# Altium PCB STEVAL-ESLWB0CB.PcbDoc (part 1 of 3)
Units mm, origin at the board's own origin, x right, y up, seen from the top; angles counter-clockwise.
Board outline 45.59 x 31.82 mm, 4 copper layers (Top Layer, Mid Layer 1, Mid Layer 2, Bottom Layer), stack 0.886 mm thick; 85 components, 64 nets, 270 pads, 388 vias.
Unrouted connection lines stored in the file: 146.
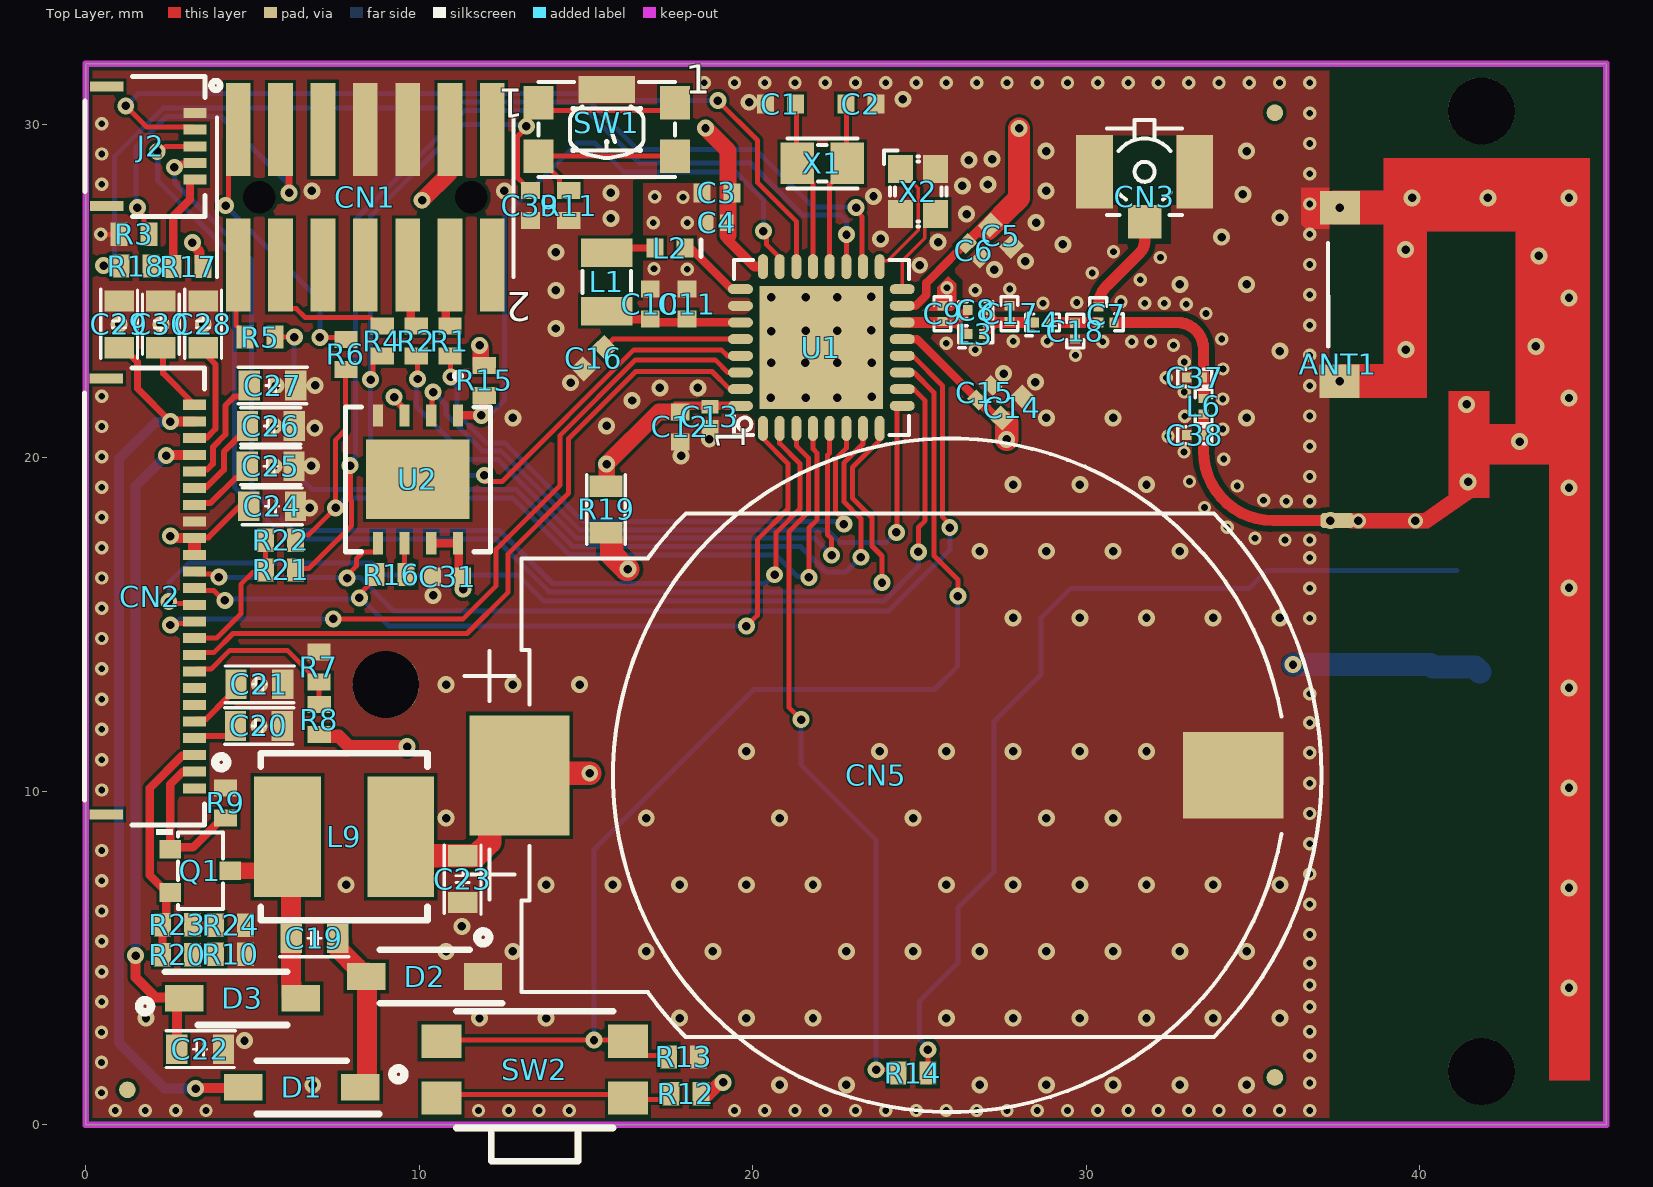
[diagram p0: Top Layer view]
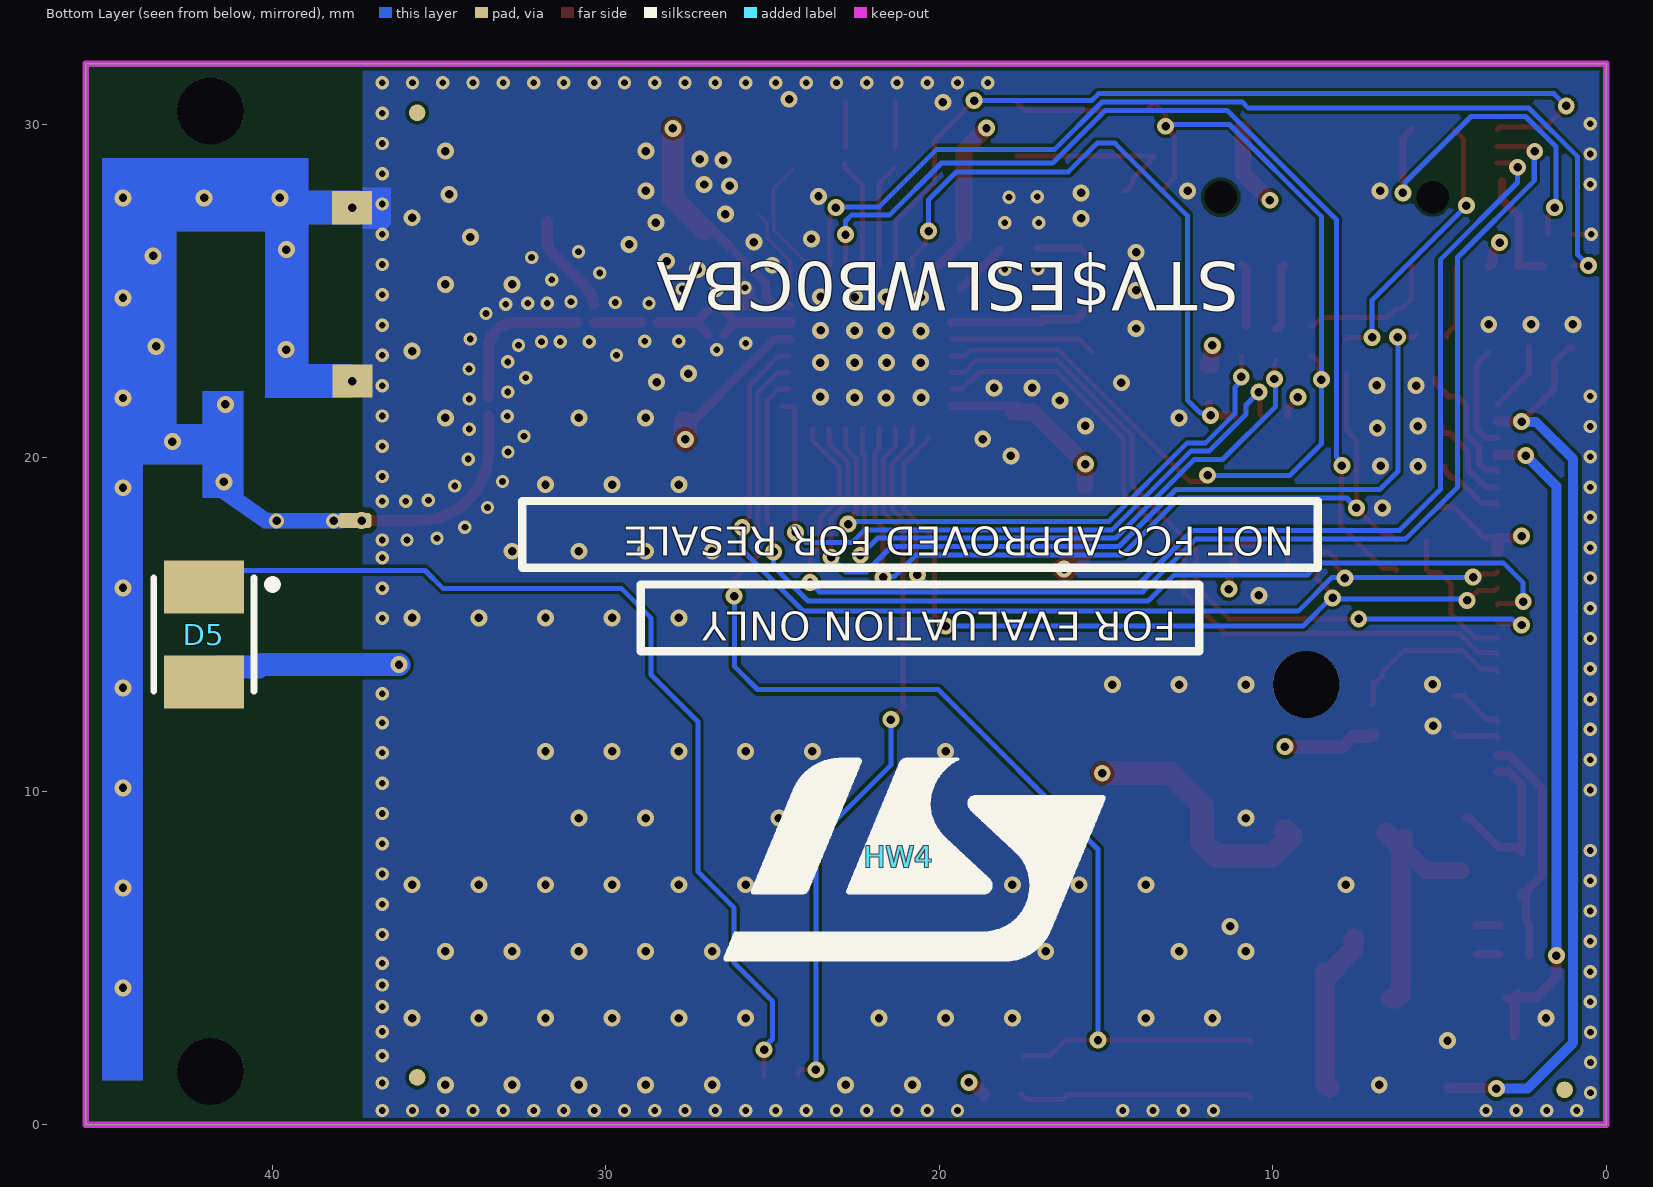
[diagram p1: Bottom Layer view, seen from below]
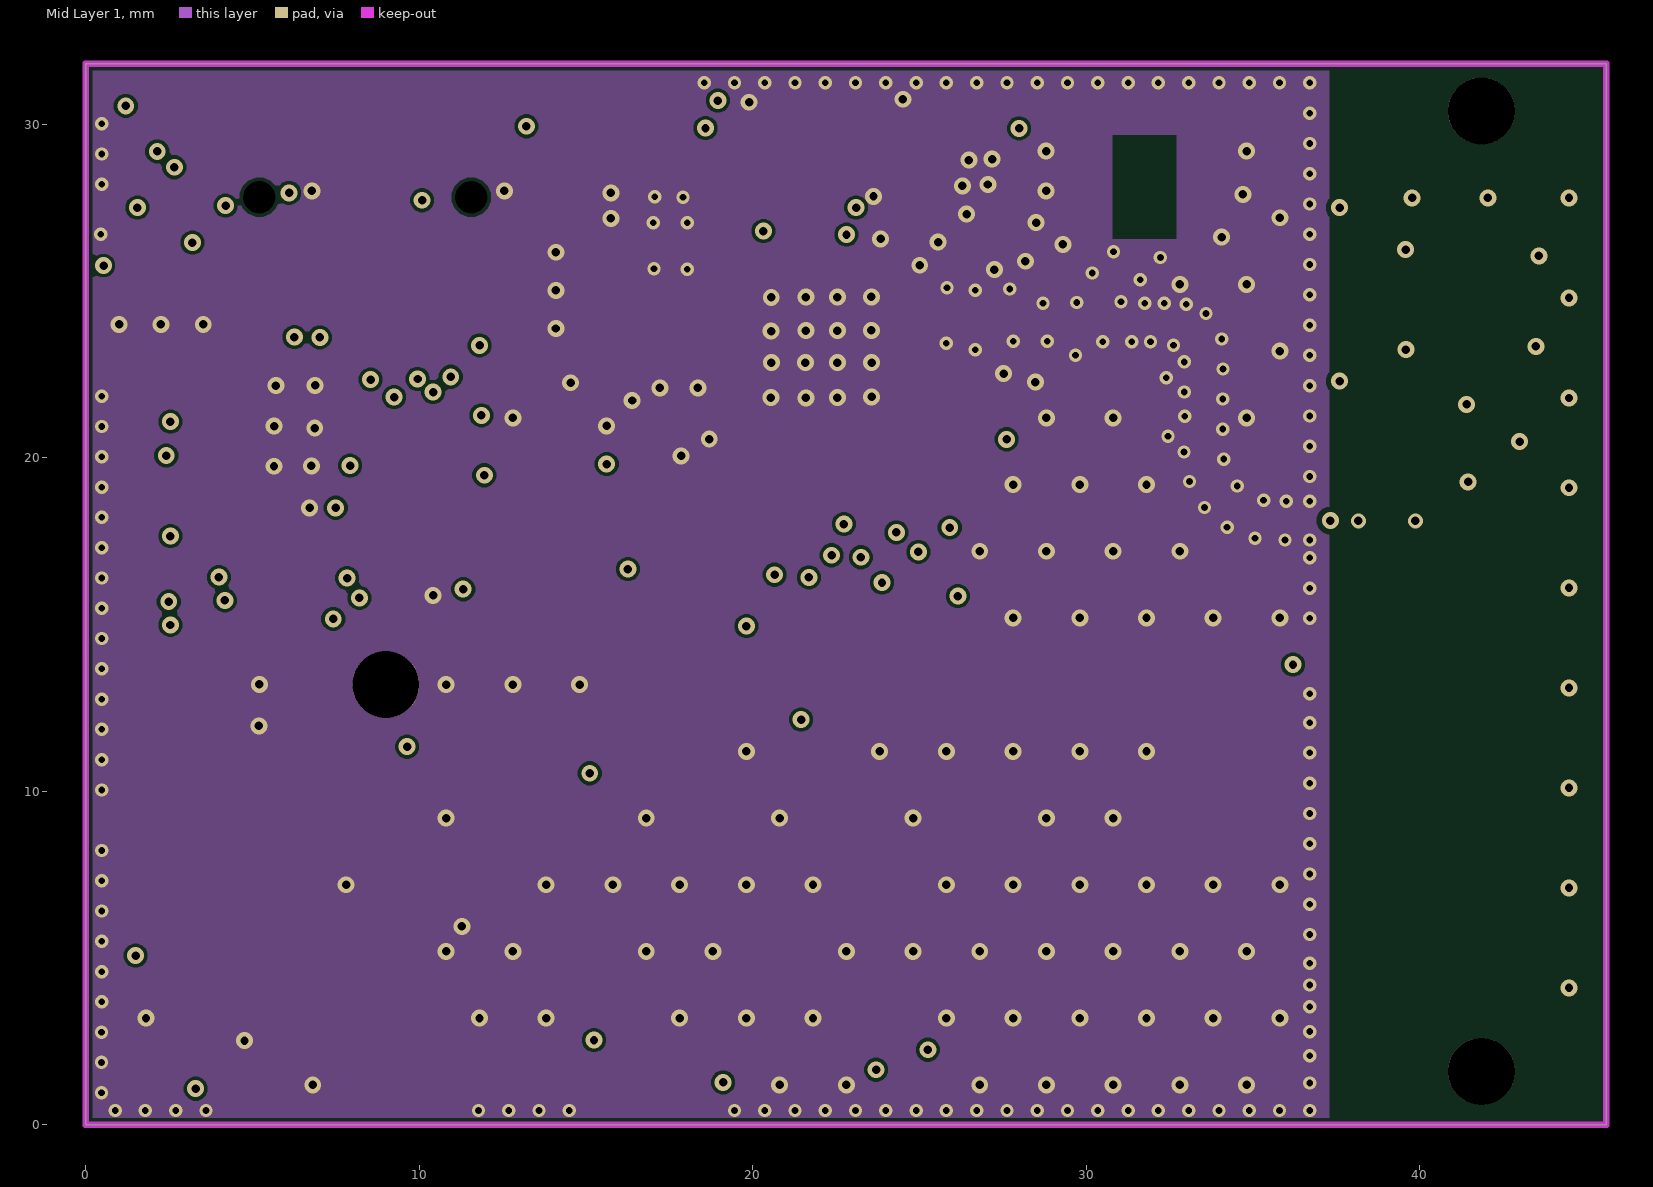
[diagram p2: Mid Layer 1]
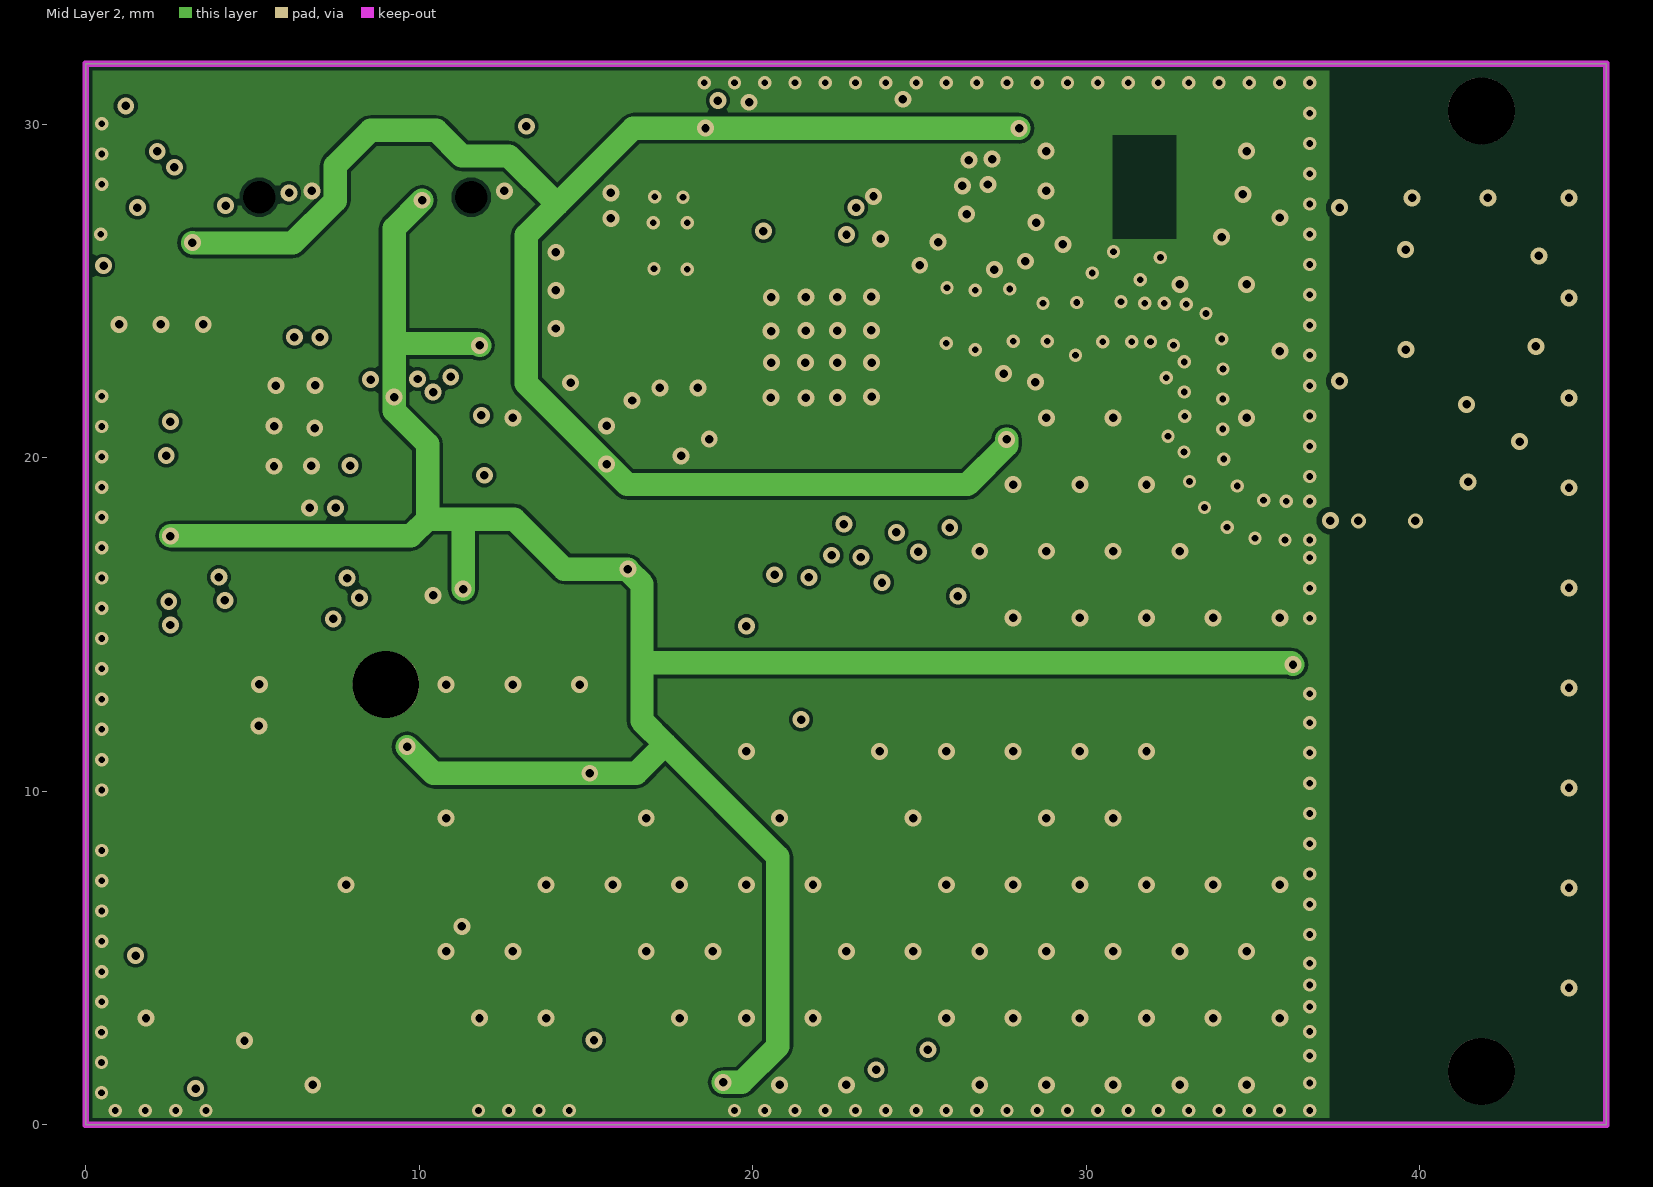
[diagram p3: Mid Layer 2]
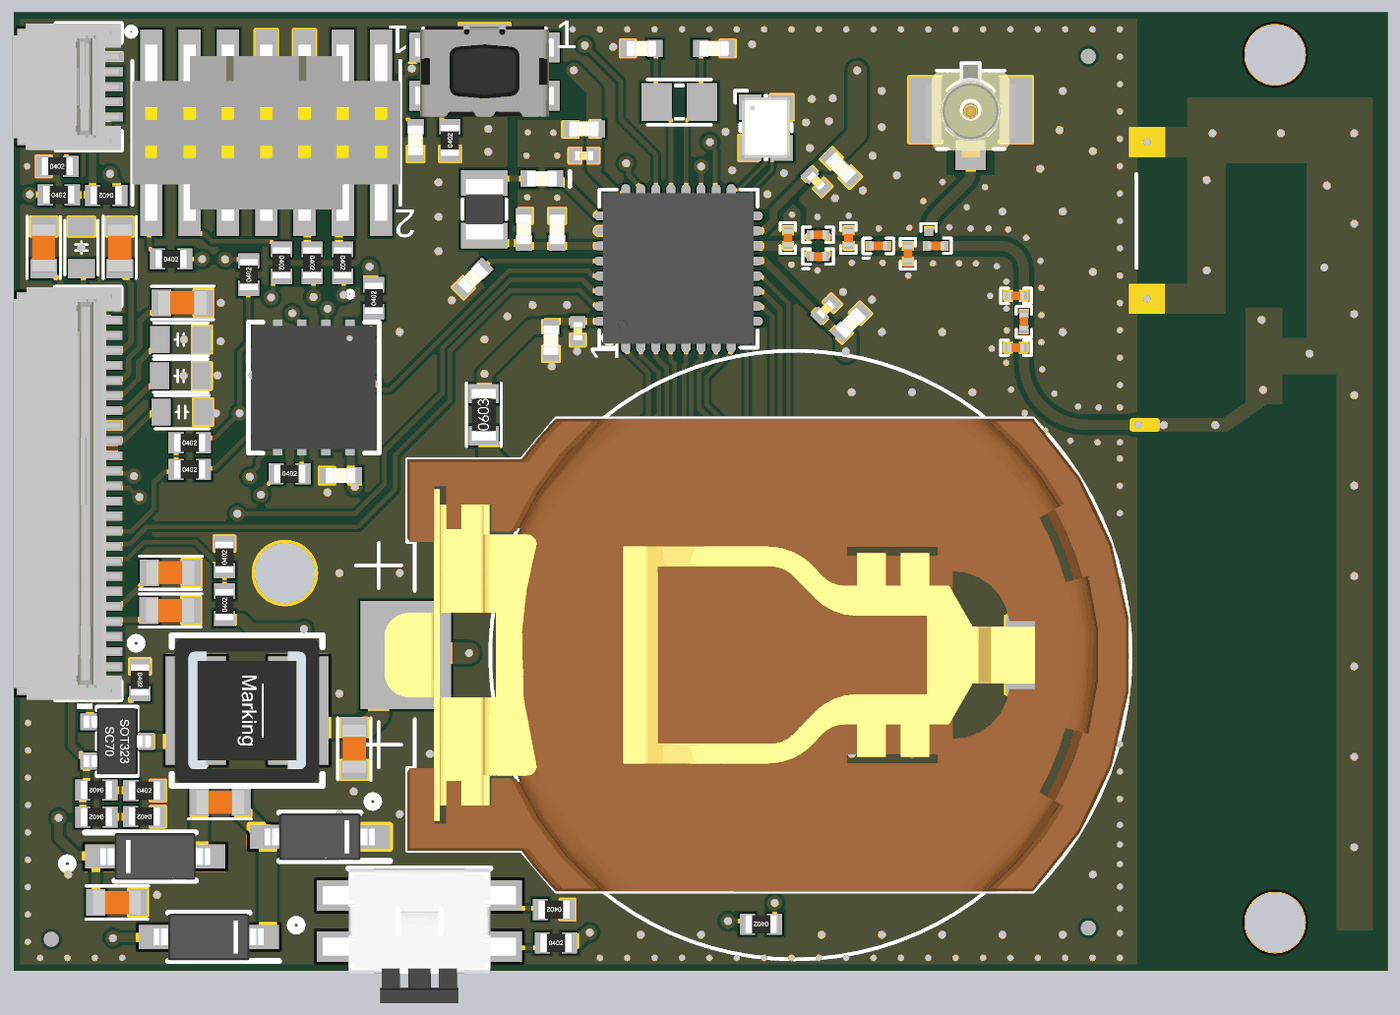
[diagram p5: 3D render of the assembled board from above, using the file's embedded part models]

## Layer stack, top to bottom
Top Solder: solder mask 0.0102, Solder Resist, Dk 3.5
Top Layer: signal copper 0.035
Dielectric 1: core 0.24, S-1000-2 (2x2116), Dk 4.34
Mid Layer 1: signal copper 0.018
Dielectric 2: core 0.3, S-1000-2 (2x1506), Dk 4.6
Mid Layer 2: signal copper 0.018
Dielectric 3: core 0.24, S-1000-2 (2x2116), Dk 4.34
Bottom Layer: signal copper 0.035
Bottom Solder: solder mask 0.0102, Solder Resist, Dk 3.5

## Board outline
0,0 45.593,0 45.593,31.819 0,31.819

## Design rules (kind name [scope] priority, off if disabled: settings)
Clearance Clearance_rf [InNet('NetC7_2','NetC7_3', 'NetANT1_1' )] p1: gap=0.165 ignorepadtopadclearanceinfootprint=FALSE
Clearance [All] p2: gap=0.1 ignorepadtopadclearanceinfootprint=FALSE
HoleSize [All] p1: absolutevalues=TRUE maxlimit=2.54 minlimit=0.2 maxpercent=80.000 minpercent=20.000
MinimumSolderMaskSliver [All] p1: minsoldermaskwidth=0.05
PolygonConnect [All] p1: connectstyle=Direct reliefconductorwidth=0.254 reliefentries=4 polygonreliefangle="90 Angle" airgapwidth=0.254
RoutingVias [All] p1: holewidth=0.254 width=0.254 viastyle="Through Hole" minholewidth=0.2 minwidth=0.4 maxholewidth=0.3 maxwidth=0.6
ShortCircuit [InNet('NetANT1_1') vs InNet('GND')] p1: allowed=TRUE
SilkToSilkClearance [All] p1 off: silktosilkclearance=0.254
SilkToSolderMaskClearance [IsPad] p1 off: minsilkscreentomaskgap=0.254 clearancetoexposedcopper=TRUE
SolderMaskExpansion [All] p1: expansion=0.102 istentingtop=FALSE
UnRoutedNet [All] p1: checkbadconnections=TRUE
Width [All] p1: maxlimit=1.4 minlimit=0.1 preferedwidth=0.15
24 further rules are at their usual default settings.

## Classes and differential pairs
component class Top: CN5 J2 R17 R18 R19 R21 R22
component class STM32WB09: ANT1 C1 C2 C3 C4 C5 C6 C7 C8 C9 C10 C11 C12 C13 C14 C15 C16 C17 C18 C37 C38 CN1 CN3 L1 L2 L3 L4 L6 R1 R2 R3 R4 R5 R6 U1 X1 X2
component class LED: D5 R14
component class FLASH: C31 R15 R16 U2
component class Display: C19 C20 C21 C22 C23 C24 C25 C26 C27 C28 C29 C30 CN2 D1 D2 D3 L9 Q1 R7 R8 R9 R10 R20 R23 R24
component class Buttons: C39 R11 R12 R13 SW1 SW2

## Components (designator, comment, footprint, x,y, rotation, side; value= is the part's Value field where it differs from the comment)
ANT1 "BLE_ANT" ANTENNA_F 37.084,18.128 r270 top
C1 "Capacitor" C0402 20.828,30.611 r180 top value=10pF
C2 "Capacitor" C0402 23.241,30.611 r180 top value=10pF
C3 "Capacitor" C0402 18.923,27.944 r0 top value=4.7uF
C4 "Capacitor" C0201_H0P3 18.923,27.055 r0 top value=100nF
C5 "Capacitor" C0402 27.441,26.66 r135 top value=1uF
C6 "Capacitor" C0201_H0P3 26.63,26.21 r135 top value=6.8pF
C7 "20 pF" "SMD 0201 DEV" 30.361,24.06 r0 top
C8 "Capacitor" 0_5p_capacitor_SMD_0201 26.69,24.431 r90 top value=0.3pF
C9 "Capacitor" 0_8p_capacitor_SMD_0201 25.688,24.321 r0 top value=0.8pF
C10 "Capacitor" C0402 16.93,24.61 r270 top value=4.7uF
C11 "Capacitor" C0402 18.03,24.61 r270 top value=100nF
C12 "Capacitor" C0402 17.83,20.932 r90 top value=1uF
C13 "Capacitor" C0201_H0P3 18.718,21.235 r90 top value=6.8pF
C14 "Capacitor" C0402 27.78,21.51 r225 top value=1uF
C15 "Capacitor" C0201_H0P3 26.956,21.954 r225 top value=6.8pF
C16 "Capacitor" C0402 15.24,22.991 r45 top value=0.22uF
C17 "Capacitor" 1_5p_capacitor_SMD_0201 27.697,24.321 r0 top value=1.5pF
C18 "Capacitor" 0_8p_capacitor_SMD_0201 29.671,23.805 r180 top value=0.8pF
C19 "Capacitor" C0603 6.858,5.592 r0 top value=4.7uF
C20 "Capacitor" C0603 5.192,11.962 r180 top value=4.7uF
C21 "Capacitor" C0603 5.207,13.212 r180 top value=4.7uF
C22 "Capacitor" C0603 3.429,2.271 r180 top value=4.7uF
C23 "Capacitor" C0603 11.303,7.37 r90 top value=4.7uF
C24 "Capacitor" C0603_H0P8 5.588,18.546 r180 top value=1uF
C25 "Capacitor" C0603_H0P8 5.545,19.75 r180 top value=1uF
C26 "Capacitor" C0603_H0P8 5.551,20.955 r180 top value=1uF
C27 "Capacitor" C0603 5.602,22.17 r180 top value=4.7uF
C28 "Capacitor" C0603 3.522,24.004 r270 top value=4.7uF
C29 "Capacitor" C0603 1,24.004 r270 top value=4.7uF
C30 "Capacitor" C0603_H0P8 2.25,24.004 r270 top value=1uF
C31 "Capacitor" C0402 10.849,16.438 r0 top value=100nF
C37 "Capacitor" 1_5p_capacitor_SMD_0201 33.256,22.404 r90 top value=TBD
C38 "Capacitor" 0_8p_capacitor_SMD_0201 33.256,20.68 r90 top value=TBD
C39 "Capacitor" C0402 13.335,27.563 r90 top value=10nF
CN1 "Header 7x2" CON_STDC14_Receiver_SMALL 8.382,27.817 r180 top
CN2 "FPC_24_0_5mm" CON_5034802400_MOL 1.762,15.844 r270 top locked
CN3 "U.FL-R-SMT-1" CON_HRS_U.FL-R-SMT-1 31.75,28.579 r0 top value=Con_RF_U.FL-R-SMT-1
CN5 "BATTERY HOLDER" BAT_HARWIN_S8421-45R_CR2032_SMD_2P 23.709,10.483 r0 top locked value=S8421-45R
D1 "MBR0530" SOD3716X135N 6.477,1.128 r180 top
D2 "MBR0530" SOD3716X135N 10.16,4.449 r180 top
D3 "MBR0530" SOD3716X135N 4.699,3.795 r0 top
D5 "Amber, 2V, 120°" WL-SMTW_3528 42.05,14.704 r270 bottom
Designator3 "Comment" Sheetbox_4L2S 48.942,-11.433 r0 top
Designator16 "Comment" IMPEDANCE_TABLE -0.45,33.55 r0 top
Designator152 "Comment" PCB_SPECIFICATIONS -0.15,90.05 r0 top
HW4 "Logo" LOGO_ST 21.209,8.042 r0 bottom
J2 "5034800540" CON_5034800540_MOL 1.778,29.341 r270 top locked
L1 "Inductor" IND_0805_MURATA_LQM21 15.621,25.277 r90 top value=10uH
L2 "Inductor" C0402 17.526,26.293 r0 top value=22nH
L3 "Inductor" 2n4_inductor_SMD_0201 26.69,23.706 r90 top value=2.4nH
L4 "Inductor" 3n3_inductor_SMD_0201 28.689,24.06 r90 top value=3.3nH
L6 "Inductor" 3n3_inductor_SMD_0201 33.518,21.542 r0 top value=0
L9 "10uH, 1.2A" WE-LQFS_4818 7.747,8.64 r270 top
Q1 "MOSFET_N-CHANNEL" MOS_SOT323-3L 3.436,7.618 r270 top value=SI1308EDL-T1-GE3
R1 "Resistor" R0402 10.922,23.499 r270 top value=0R
R2 "Resistor" R0402 9.906,23.499 r270 top value=0R
R3 "Resistor" R0402 1.45,26.704 r0 top value=0R
R4 "Resistor" R0402 8.89,23.499 r270 top value=0R
R5 "Resistor" R0402 5.226,23.624 r0 top value=0R
R6 "Resistor" R0402 7.802,23.108 r90 top value=0R
R7 "Resistor" R0402 6.994,13.729 r90 top value=3
R8 "Resistor" R0402 7,12.154 r90 top value=10K
R9 "Resistor" R0402 4.191,9.656 r270 top value=10K
R10 "Resistor" R0402 4.336,5.121 r180 top value=3
R11 "Resistor" R0402 14.478,27.563 r90 top value=100R
R12 "Resistor" R0402 17.995,0.931 r0 top value=100R
R13 "Resistor" R0402 17.929,2.036 r180 top value=100K
R14 "Resistor" R0402 24.8,1.554 r180 top value=100R
R15 "Resistor" R0402 11.947,22.324 r90 top value=10K
R16 "Resistor" R0402 9.158,16.503 r0 top value=22R
R17 "Resistor" R0402 3.071,25.739 r180 top value=0R
R18 "Resistor" R0402 1.5,25.754 r0 top value=0R
R19 "Resistor" R0603 15.6,18.454 r90 top value=0R
R20 "Resistor" R0402 2.75,5.104 r180 top value=0R
R21 "Resistor" R0402 5.842,16.641 r0 top value=0R
R22 "Resistor" R0402 5.842,17.53 r0 top value=0R
R23 "Resistor" R0402 2.75,6.004 r180 top value=0R
R24 "Resistor" R0402 4.341,5.987 r0 top value=0R47
SW1 "SW-PUSH-CMS_BLACK_PIN1-3_2-4" SWI_C&K_Y78B23110FP__ITT_KMR231GLFS 15.621,29.849 r0 top value=Y78B23110FP
SW2 "434351045816" 434351045816 13.462,1.655 r0 top
U1 "STM32WB09" ICC_QFN32-EPAD_5X5_P050 22.058,23.31 r0 top
U2 "W25Q64JVXGIQ" "DFN_XGIQ TR_WIN-L" 9.96,19.359 r270 top
X1 "XTAL_2_PINS" CRY_NX2012SA_2P 22.086,28.833 r0 top value=32.768kHz
X2 "XTAL_4_PINS" CRY_NX2016SA_4P 24.962,27.988 r270 top value=32MHz

## Footprints (in the part's own frame and the unit in brackets; to place one, negate y for a bottom-side part, rotate by r counter-clockwise, add the part's x,y. Pads: shape width x height; smd on the part's side, far side on the other; paste and mask are expansions set on the pad)
0_5p_capacitor_SMD_0201 [mm] "SMD 0201"
  rect 0.3x0.28 smd mask+0.05: 1(0.002,0.238) 2(0.002,-0.232)
  silkscreen extent -0.25,-0.51 0.25,0.51, body extent -0.15,-0.3 0.15,0.3, height 0.3
0_8p_capacitor_SMD_0201 [mm] "SMD 0201"
  rect 0.3x0.28 smd mask+0.05: 1(0.002,0.238) 2(0.002,-0.232)
  silkscreen extent -0.25,-0.51 0.25,0.51, body extent -0.15,-0.3 0.15,0.3, height 0.3
1_5p_capacitor_SMD_0201 [mm] "SMD 0201"
  rect 0.3x0.28 smd mask+0.05: 1(0.002,0.238) 2(0.002,-0.232)
  silkscreen extent -0.25,-0.51 0.25,0.51, body extent -0.15,-0.3 0.15,0.3, height 0.3
2n4_inductor_SMD_0201 [mm] "SMD 0201"
  rect 0.3x0.28 smd mask+0.05: 1(0.002,0.238) 2(0.002,-0.232)
  silkscreen extent -0.4,-0.51 0.25,0.51, body extent -0.15,-0.3 0.15,0.3, height 0.3
3n3_inductor_SMD_0201 [mm] "SMD 0201"
  rect 0.3x0.28 smd mask+0.05: 1(0.002,0.238) 2(0.002,-0.232)
  silkscreen extent -0.4,-0.51 0.25,0.51, body extent -0.15,-0.3 0.15,0.3, height 0.3
434351045816 [mm] "3.5x4.7 mm SMD side push"
  rect 1.2x1 smd: A1(-2.8,0.85) A2(2.8,0.85) B1(-2.8,-0.85) B2(2.8,-0.85)
  silkscreen extent -2.35,-2.75 2.35,1.75, body extent -3.2,-2.75 3.2,1.75, height 1.65
ANTENNA_F [mm] "Tuned"
  rrect50% 0.46x1 smd far side paste-0.8 mask+0: 1(0.006,0.439)
  rrect50% 0.46x1 smd paste-0.8 mask+0: 1(0.006,0.439)
  rect 1x1.2 smd far side paste-1 mask+0: 2(-9.376,0.521) 2(-4.176,0.516)
  rect 1x1.2 smd paste-1 mask+0: 2(-9.376,0.521) 2(-4.176,0.516)
  Top Layer region: 16.782,8.012 16.782,6.802 -1.676,6.802 -1.676,5.002 -0.676,5.002 -0.676,4.5 0.234,3.181 0.234,0.818 -0.217,0.818 -0.217,3.025 -0.747,3.792 -3.876,3.792 -3.876,5.002 -2.876,5.002 -2.876,5.802 -8.676,5.802 -8.676,3.133 -3.676,3.133 -3.676,0.521 -4.676,0.521 -4.676,1.842 -8.876,1.842 -8.876,0.3 -9.876,0.3 -9.876,1.842 -10.856,1.842 -10.856,8.012
  Bottom Layer region: 16.782,8.012 16.782,6.802 -1.676,6.802 -1.676,5.002 -0.676,5.002 -0.676,4.5 0.234,3.181 0.234,0.818 -0.217,0.818 -0.217,3.025 -0.747,3.792 -3.876,3.792 -3.876,5.002 -2.876,5.002 -2.876,5.802 -8.676,5.802 -8.676,3.133 -3.676,3.133 -3.676,0.516 -4.676,0.516 -4.676,1.842 -8.876,1.842 -8.876,0.3 -9.876,0.3 -9.876,1.842 -10.856,1.842 -10.856,8.012
  silkscreen extent -8.32,0.17 -5.21,0.17
BAT_HARWIN_S8421-45R_CR2032_SMD_2P [mm] "MCD-02936"
  rect 3x3.6 smd mask+0.05: 1(-10.7,0)
  rect 3x2.6 smd mask+0.05: 2(10.7,0)
  silkscreen extent -12.35,-10.1 13.35,10.1, body extent -11.4,-7.85 13.35,7.85, height 5.3
C0201_H0P3 [mm] "MCD-00699"
  rect 0.4x0.5 smd mask+0.05: 1(-0.3,0) 2(0.3,0)
  body extent -0.32,-0.17 0.32,0.17, height 0.33
C0402 [mm]
  rect 0.51x0.56 smd mask+0.05: 1(-0.45,0) 2(0.45,0)
  body extent -0.5,-0.31 0.5,0.31, height 0.4
C0603 [mm]
  rect 0.64x0.89 smd mask+0.05: 1(-0.7,0) 2(0.7,0)
  silkscreen extent -1.05,-0.55 1.02,0.55, body extent -0.9,-0.5 0.9,0.5, height 1.4
C0603_H0P8 [mm] "MCD-01540"
  rect 0.64x0.89 smd mask+0.05: 1(-0.7,0) 2(0.7,0)
  silkscreen extent -0.9,-0.55 0.9,0.55, body extent -0.9,-0.5 0.9,0.5, height 1
CON_5034800540_MOL [mm]
  rect 0.3x0.7 smd paste+0 mask+0.025: 1(-1,1.5) 2(-0.5,1.5) 3(0,1.5) 4(0.5,1.5) 5(1,1.5)
  rect 0.3x1 smd paste+0 mask+0.076: P1(-1.79,-1.15) P2(1.79,-1.15)
  silkscreen extent -2.1,-1.8 2.1,2.25, body extent -2.1,-1.82 2.1,1.78, height 1.87
CON_5034802400_MOL [mm]
  rect 0.3x0.7 smd paste+0 mask+0.025: 1(5.75,1.5) 2(5.25,1.5) 3(4.75,1.5) 4(4.25,1.5) 5(3.75,1.5) 6(3.25,1.5) 7(2.75,1.5) 8(2.25,1.5) 9(1.75,1.5) 10(1.25,1.5) 11(0.75,1.5) 12(0.25,1.5) 13(-0.25,1.5) 14(-0.75,1.5) 15(-1.25,1.5) 16(-1.75,1.5) 17(-2.25,1.5) 18(-2.75,1.5) 19(-3.25,1.5) 20(-3.75,1.5) 21(-4.25,1.5) 22(-4.75,1.5) 23(-5.25,1.5) 24(-5.75,1.5)
  rect 0.3x1 smd paste+0 mask+0.076: P1(-6.54,-1.15) P2(6.54,-1.15)
  silkscreen extent -6.85,-1.8 6.85,1.8, body extent -6.85,-1.78 6.85,1.82, height 1.87
CON_HRS_U.FL-R-SMT-1 [mm] "MCD-01583"
  rect 1x1 smd mask+0.05: 1(0,-1.5)
  rect 1.1x2.2 smd mask+0.05: 2(-1.5,0) 3(1.5,0)
  silkscreen extent -1.12,-1.3 1.12,1.55, body extent -1.5,-1.6 1.5,1.5, height 1.25
CON_STDC14_Receiver_SMALL [mm] "compatible with Samtec FTSH-107-01-L-DV,-K,-A,-P"
  round 0 hole 0.97 unplated mask+0.05: 0(-3.175,0) 0(3.175,0)
  rect 0.74x2.79 smd mask+0.05: 1(-3.81,-2.032) 2(-3.81,2.032) 3(-2.54,-2.032) 4(-2.54,2.032) 5(-1.27,-2.032) 6(-1.27,2.032) 7(0,-2.032) 8(0,2.032) 9(1.27,-2.032) 10(1.27,2.032) 11(2.54,-2.032) 12(2.54,2.032) 13(3.81,-2.032) 14(3.81,2.032)
  silkscreen extent -4.44,-2.39 4.44,2.39, body extent -4.45,-2.92 4.45,2.92, height 6.6
CRY_NX2012SA_2P [mm]
  rect 1x1.25 smd mask+0.05: 1(-0.75,0) 2(0.75,0)
  silkscreen extent -1.05,-0.75 1.05,0.75, body extent -1.05,-0.63 1.05,0.63, height 0.6
CRY_NX2016SA_4P [mm]
  rect 0.85x0.75 smd mask+0.05: 1(-0.675,-0.525) 2(0.675,-0.525) 3(0.675,0.525) 4(-0.675,0.525)
  silkscreen extent -1.22,-1.02 1.05,0.85, body extent -1.05,-0.85 1.05,0.85, height 0.7
"DFN_XGIQ TR_WIN-L" [mil]
  rect 26x12 smd paste+0 mask+0: 1(-75.5,47.25) 2(-75.5,15.75) 3(-75.5,-15.75) 4(-75.5,-47.25) 5(75.5,-47.25) 6(75.5,-15.75) 7(75.5,15.75) 8(75.5,47.25)
  rect 94x122 smd paste+0 mask+0: 9(0,0)
  silkscreen extent -126,-86 86,86, body extent -81,-81 80,80, height 32
ICC_QFN32-EPAD_5X5_P050 [mm]
  oval 0.3x0.75 smd mask+0.05: 1(-1.75,-2.425) 2(-1.25,-2.425) 3(-0.75,-2.425) 4(-0.25,-2.425) 5(0.25,-2.425) 6(0.75,-2.425) 7(1.25,-2.425) 8(1.75,-2.425) 17(1.75,2.425) 18(1.25,2.425) 19(0.75,2.425) 20(0.25,2.425) 21(-0.25,2.425) 22(-0.75,2.425) 23(-1.25,2.425) 24(-1.75,2.425)
  oval 0.75x0.3 smd mask+0.05: 9(2.425,-1.75) 10(2.425,-1.25) 11(2.425,-0.75) 12(2.425,-0.25) 13(2.425,0.25) 14(2.425,0.75) 15(2.425,1.25) 16(2.425,1.75) 25(-2.425,1.75) 26(-2.425,1.25) 27(-2.425,0.75) 28(-2.425,0.25) 29(-2.425,-0.25) 30(-2.425,-0.75) 31(-2.425,-1.25) 32(-2.425,-1.75)
  rect 3.7x3.7 smd mask+0.05: 33(0,0)
  silkscreen extent -2.62,-2.63 2.63,2.63, body extent -2.55,-2.55 2.55,2.55, height 1
IMPEDANCE_TABLE [mm]
IND_0805_MURATA_LQM21 [mm] "MCD-02317"
  rect 0.85x1.55 smd mask+0.05: 1(-0.875,0) 2(0.875,0)
  silkscreen extent -0.33,-0.73 0.33,0.73, body extent -1.1,-0.73 1.1,0.73, height 1.45
LOGO_ST [mm]
  silkscreen extent -6.18,-2.95 5.25,3.14
MOS_SOT323-3L [mm] "MCD-02504"
  rect 0.56x0.65 smd mask+0.05: 1(-0.65,-0.9) 2(0.65,-0.9) 3(0,0.9)
  silkscreen extent -1.25,-1.32 1.15,0.67, body extent -1.1,-1.12 1.1,1.12, height 1.1
PCB_SPECIFICATIONS [mm]
R0402 [mm]
  rect 0.51x0.7 smd mask+0.05: 1(-0.45,0) 2(0.45,0)
  body extent -0.52,-0.3 0.52,0.3, height 0.4
R0603 [mm]
  rect 0.64x1 smd mask+0.05: 1(-0.7,0) 2(0.7,0)
  silkscreen extent -1.05,-0.58 1.05,0.58, body extent -0.9,-0.5 0.9,0.5, height 0.56
Sheetbox_4L2S [mil] "Sheetbox 4 layers / 2 silkscreens"
  round 20 on Mech16: 1(813.78,210.69) 1(2736.9,210.69)
"SMD 0201 DEV" [mm] "SMD 0201"
  rect 0.3x0.3 smd mask+0.05: 1(0,0)
  rect 0.3x0.28 smd mask+0.05: 2(0,0.47)
  rect 0.28x0.3 smd mask+0.05: 3(0.47,0)
  silkscreen extent -0.26,-0.25 0.75,0.74, body extent -0.06,-0.15 0.54,0.15, height 0.3
SOD3716X135N [mm]
  rect 1.15x0.8 smd: 1(-1.75,0) 2(1.75,0)
  silkscreen extent -2.32,-0.8 1.35,0.8, body extent -1.83,-0.77 1.83,0.77, height 1.45
SWI_C&K_Y78B23110FP__ITT_KMR231GLFS [mm] "MCD-00715"
  rect 0.9x1 smd mask+0.05: 1(2.05,0.8) 2(2.05,-0.8) 3(-2.05,0.8) 4(-2.05,-0.8)
  rect 1.7x0.8 smd mask+0.05: 5(0,1.2)
  silkscreen extent -2.05,-1.43 2.05,1.43, body extent -2.3,-1.5 2.3,1.5, height 2.1
WE-LQFS_4818 [mm] "SMT Power Inductor, body 4.8x4.8mm"
  rect 3.6x2 smd: 1(0,1.7) 2(0,-1.7)
  silkscreen extent -2.5,-2.5 2.5,2.5, body extent -2.4,-2.4 2.4,2.4, height 1.8
WL-SMTW_3528 [mm] "SMD Mono-color TOP LED, body 3.2x2.8mm"
  rect 1.6x2.4 smd: 1(-1.425,0) 2(1.425,0)
  silkscreen extent -1.7,-1.5 1.7,2.18, body extent -1.75,-1.4 1.75,1.4, height 1.9

## Part data
ANT1: "2.4 GHz PIFA"
C1 C2: library part MCD-00015, "Capacitor, MLCC, 10pF, 50V, NPO, +/-5%, 0402, T=0.5mm", Manufacturer=YAGEO, Manufacturer Part Number=CC0402JRNPO9BN100, Package=0402, Component_Country_Of_Origin=China, ComponentLink1URL=http://tunmcdsvn.tun.st.com/Component_Documentation_Library/Trunk/Capacitor/YAGEO_NP0_Series, ID=2465, Internal_Part_Number=MCD-00015, Manufacturer_Part_Number=CC0402JRNPO9BN100, Order_Code_Digikey=311-1014-1-ND, Order_Code_Farnell=3019160RL, Order_Code_RS=3019160RL, Part_Preference=Recommended, Part_Type=Capacitor, ShowFields=YES, Status=Released
C3 C10: library part MCD-03431, "Capacitor, MLCC, 4.7uF, X5R, 10V, +/-20%, 0402, T=0.5mm", Manufacturer=MURATA, Manufacturer Part Number=GRM155R61A475MEAAD, Package=0402, Component_Country_Of_Origin="China, Japan, Philippines, Singapore", ComponentLink1URL=http://tunmcdsvn.tun.st.com/Component_Documentation_Library/Trunk/Capacitor/MURATA_GRM_Series/GRM155R61A475MEAAD, ID=5547, Internal_Part_Number=MCD-03431, Manufacturer_Part_Number=GRM155R61A475MEAAD, Order_Code_Digikey=90-14306-2-ND, Order_Code_Farnell=2688503RL, Order_Code_RS=172-6870, Part_Preference=Recommended, Part_Type=Capacitor, ShowFields=YES, Status=Checked
C4: library part MCD-01535, "Capacitor, MLCC,100nF, 10V, X5R, +/-10%, 0201, T=0.3mm", Manufacturer=MURATA, Manufacturer Part Number=GRM033R61A104KE15, Package=0201, Component_Country_Of_Origin=Japan, ComponentLink1URL=http://tunmcdsvn.tun.st.com/Component_Documentation_Library/Trunk/Capacitor/MURATA_GRM_Series, ID=3635, Internal_Part_Number=MCD-01535, Manufacturer_Part_Number=GRM033R61A104KE15, Order_Code_Digikey=490-5881-1-ND, Order_Code_Farnell=2470450, Order_Code_RS=790-2742, Part_Preference=Recommended, Part_Type=Capacitor, ShowFields=YES, Status=Released
C5 C12 C14: library part MCD-03432, "Capacitor, MLCC, 1uF, X7R, 6.3V,+/- 10%, 0402, T=0.5mm", Manufacturer=MURATA, Manufacturer Part Number=GRM155R70J105KA12, Package=0402, Component_Country_Of_Origin="China, Japan, Philippines, Singapore", ComponentLink1URL=http://tunmcdsvn.tun.st.com/Component_Documentation_Library/Trunk/Capacitor/MURATA_GRM_Series/GRM155R70J105KA12, ID=5548, Internal_Part_Number=MCD-03432, Manufacturer_Part_Number=GRM155R70J105KA12, Order_Code_Digikey=NA, Order_Code_Farnell=NA, Order_Code_RS=113-8711, Part_Preference=Recommended, Part_Type=Capacitor, ShowFields=YES, Status=Checked
C6 C13 C15: library part MCD-02284, "Cap Ceramic 6.8pF 25V C0G 0.25pF SMD 0201 125°C Paper T/R", Manufacturer=Murata, Manufacturer Part Number=GJM0335C1E6R8CB01D, Supplier Part Number 1=490-3076-1-ND, Category="Ceramic Capacitors", ComponentLink1URL=http://tunmcdsvn.tun.st.com/Component_Documentation_Library/Trunk/Capacitor/MURATA_GRM_Series, ComponentLink2Description=https://datasheet.ciiva.com/11611/product-11611316.pdf?src-supplier=Avnet, ComponentLink2URL=https://datasheet.ciiva.com/11611/product-11611316.pdf?src-supplier=Avnet, ComponentLink3Description=https://datasheet.ciiva.com/133/partnumbering-e-01-133417.pdf?src-supplier=Digi-Key, ComponentLink3URL=https://datasheet.ciiva.com/133/partnumbering-e-01-133417.pdf?src-supplier=Digi-Key, ComponentLink4Description=https://datasheet.ciiva.com/133/partnumbering-e-01-133418.pdf?src-supplier=Digi-Key, ComponentLink4URL=https://datasheet.ciiva.com/133/partnumbering-e-01-133418.pdf?src-supplier=Digi-Key, ComponentLink5Description=https://datasheet.ciiva.com/133/partnumbering-e-01-133419.pdf?src-supplier=Digi-Key, ComponentLink5URL=https://datasheet.ciiva.com/133/partnumbering-e-01-133419.pdf?src-supplier=Digi-Key, ComponentLink6Description=https://datasheet.ciiva.com/11611/product-11611254.pdf?src-supplier=Avnet, ComponentLink6URL=https://datasheet.ciiva.com/11611/product-11611254.pdf?src-supplier=Avnet, Pricing 1="1=0.1, 10=0.033, 50=0.0188, 100=0.0146, 500=0.01096, 1000=0.00861, 2500=0.00783, 5000=0.0072 (USD)", RoHS=Yes, Stock 1=9238, Supplier 1=Digi-Key
C7: library part C_0201_DEV, "Cap Ceramic 20pF 25V C0G 2% Pad SMD 0201 125C T/R", Manufacturer=Murata, Manufacturer Part Number=GJM0335C1E200GB01D, Supplier Part Number 1=490-GJM0335C1E200GB01DCT-ND, Category="Ceramic Capacitors", ComponentLink1Description=http://www.mouser.com/ds/2/281/c02e-2905.pdf?src-supplier=Mouser, ComponentLink1URL=http://www.mouser.com/ds/2/281/c02e-2905.pdf?src-supplier=Mouser, ComponentLink6Description=https://datasheet.ciiva.com/28386/pyu-rc0402-51-rohs-l-6-28386633.pdf?src-supplier=Avnet+Europe, ComponentLink6URL=https://datasheet.ciiva.com/28386/pyu-rc0402-51-rohs-l-6-28386633.pdf?src-supplier=Avnet+Europe, ComponentLink9Description=https://datasheet.ciiva.com/15189/getdatasheetpartid-326379-15189533.pdf?src-supplier=Verical, ComponentLink9URL=https://datasheet.ciiva.com/15189/getdatasheetpartid-326379-15189533.pdf?src-supplier=Verical, ComponentLink10Description=https://datasheet.ciiva.com/7983/1018594-7983535.pdf?src-supplier=Element14, ComponentLink10URL=https://datasheet.ciiva.com/7983/1018594-7983535.pdf?src-supplier=Element14, ComponentLink11Description=https://datasheet.ciiva.com/2560/pyu-r-int-thick-7-2560866.pdf?src-supplier=Digi-Key, ComponentLink11URL=https://datasheet.ciiva.com/2560/pyu-r-int-thick-7-2560866.pdf?src-supplier=Digi-Key, ComponentLink12Description=https://datasheet.ciiva.com/2560/pyu-r-int-thick-7-2560867.pdf?src-supplier=Digi-Key, ComponentLink12URL=https://datasheet.ciiva.com/2560/pyu-r-int-thick-7-2560867.pdf?src-supplier=Digi-Key, ComponentLink13Description=https://datasheet.ciiva.com/2560/pyu-r-int-thick-7-2560865.pdf?src-supplier=Digi-Key, ComponentLink13URL=https://datasheet.ciiva.com/2560/pyu-r-int-thick-7-2560865.pdf?src-supplier=Digi-Key, ComponentLink14Description=https://datasheet.ciiva.com/8887/pyu-rc0201-51-rohs-l-8-8887865.pdf?src-supplier=Avnet, ComponentLink14URL=https://datasheet.ciiva.com/8887/pyu-rc0201-51-rohs-l-8-8887865.pdf?src-supplier=Avnet, Pricing 1="1=0.1, 10=0.063, 50=0.0378, 100=0.0297, 500=0.02192, 1000=0.01815, 2500=0.0169, 5000=0.01546 (USD)", RoHS=Yes, Stock 1=21920, Supplier 1=Digi-Key
C8: library part MCD-02284_2, "0201 0.4 pF 25 V ±0.05 pF Tolerance C0G SMT Multilayer Ceramic Capacitor", Manufacturer=Murata, Manufacturer Part Number=GJM0335C1ER30WB01D, Supplier Part Number 1=490-8073-1-ND, Category="Ceramic Capacitors", ComponentLink1URL=http://tunmcdsvn.tun.st.com/Component_Documentation_Library/Trunk/Capacitor/MURATA_GRM_Series, ComponentLink2Description=https://datasheet.ciiva.com/11617/product-11617172.pdf?src-supplier=Avnet, ComponentLink2URL=https://datasheet.ciiva.com/11617/product-11617172.pdf?src-supplier=Avnet, ComponentLink3Description=https://datasheet.ciiva.com/29541/partnumbering-e-01-29541903.pdf?src-supplier=Digi-Key, ComponentLink3URL=https://datasheet.ciiva.com/29541/partnumbering-e-01-29541903.pdf?src-supplier=Digi-Key, ComponentLink4Description=https://datasheet.ciiva.com/29541/partnumbering-e-01-29541902.pdf?src-supplier=Digi-Key, ComponentLink4URL=https://datasheet.ciiva.com/29541/partnumbering-e-01-29541902.pdf?src-supplier=Digi-Key, ComponentLink5Description=https://datasheet.ciiva.com/11617/product-11617570.pdf?src-supplier=Avnet, ComponentLink5URL=https://datasheet.ciiva.com/11617/product-11617570.pdf?src-supplier=Avnet, ComponentLink6Description=https://datasheet.ciiva.com/170/gjm0335c1er30wb01-170840.pdf?src-supplier=Digi-Key, ComponentLink6URL=https://datasheet.ciiva.com/170/gjm0335c1er30wb01-170840.pdf?src-supplier=Digi-Key, ComponentLink7Description=https://datasheet.ciiva.com/29541/partnumbering-e-01-29541493.pdf?src-supplier=Digi-Key, ComponentLink7URL=https://datasheet.ciiva.com/29541/partnumbering-e-01-29541493.pdf?src-supplier=Digi-Key, ComponentLink8Description=https://datasheet.ciiva.com/29541/partnumbering-e-01-29541494.pdf?src-supplier=Digi-Key, ComponentLink8URL=https://datasheet.ciiva.com/29541/partnumbering-e-01-29541494.pdf?src-supplier=Digi-Key, ComponentLink9Description=https://datasheet.ciiva.com/29541/partnumbering-e-01-29541495.pdf?src-supplier=Digi-Key, ComponentLink9URL=https://datasheet.ciiva.com/29541/partnumbering-e-01-29541495.pdf?src-supplier=Digi-Key, ComponentLink10Description=https://datasheet.ciiva.com/16467/product-16467435.pdf?src-supplier=Future+Electronics, ComponentLink10URL=https://datasheet.ciiva.com/16467/product-16467435.pdf?src-supplier=Future+Electronics, Pricing 1="1=0.14, 10=0.094, 50=0.0562, 100=0.0442, 500=0.03266, 1000=0.02703, 2500=0.02516, 5000=0.02302 (USD)", RoHS=Yes, Stock 1=344905, Supplier 1=Digi-Key
C9 C18 C38: library part MCD-02284_1, "Multilayer Ceramic Capacitor, 0.8 pF, 25 V, ± 0.05pF, C0G (NP0), 0201 [0603 Metric]", Manufacturer=Murata, Manufacturer Part Number=GJM0335C1ER80WB01D, Temperature Coefficient=30ppm/°C, Category="Ceramic Capacitors", ComponentLink1URL=http://tunmcdsvn.tun.st.com/Component_Documentation_Library/Trunk/Capacitor/MURATA_GRM_Series, ComponentLink2Description=https://datasheet.ciiva.com/11616/product-11616837.pdf?src-supplier=Avnet, ComponentLink2URL=https://datasheet.ciiva.com/11616/product-11616837.pdf?src-supplier=Avnet, ComponentLink3Description=https://datasheet.ciiva.com/170/partnumbering-e-01-170845.pdf?src-supplier=Digi-Key, ComponentLink3URL=https://datasheet.ciiva.com/170/partnumbering-e-01-170845.pdf?src-supplier=Digi-Key, Material=4241ConductorMaterial, Pricing 1="1=0.072, 10=0.0302, 25=0.0296, 100=0.0178, 250=0.0176, 500=0.0175, 1000=0.0173, 3000=0.0172, 6000=0.0171, 15000=0.0169 (USD)", RoHS=Yes, Stock 1=23495, Supplier 1="Arrow Electronics", Supplier Part Number 1=GJM0335C1ER80WB01D
C11: library part MCD-03442, "Capacitor, MLCC, 100nF, +/-10%, X7R, 25V, 0402, T=0.5mm", Manufacturer=MURATA, Manufacturer Part Number=GRM155R71E104KE14D, Package=0402, Component_Country_Of_Origin="China, Japan, Philippines, Singapore", ComponentLink1URL=http://tunmcdsvn.tun.st.com/Component_Documentation_Library/Trunk/Capacitor/MURATA_GRM_Series/GRM155R71E104KE14, ID=5558, Internal_Part_Number=MCD-03442, Manufacturer_Part_Number=GRM155R71E104KE14D, Order_Code_Digikey=490-10698-2-ND, Order_Code_Farnell=NA, Order_Code_RS=NA, Part_Preference=Recommended, Part_Type=Capacitor, ShowFields=YES, Status=Checked
C16: library part MCD-03483, "Capacitor, MLCC, 0.22uF, X5R, 6.3V, +/-10%, 0402, T=0.5mm", Manufacturer=YAGEO, Manufacturer Part Number=CC0402KRX5R5BB224, Package=0402, Component_Country_Of_Origin=China, ComponentLink1URL=http://tunmcdsvn.tun.st.com/Component_Documentation_Library/Trunk/Capacitor/YAGEO_X5R_Series, ID=5599, Internal_Part_Number=MCD-03483, Manufacturer_Part_Number=CC0402KRX5R5BB224, Order_Code_Digikey=311-1681-2-ND, Order_Code_Farnell=3369131, Order_Code_RS=3369131, Part_Preference=Recommended, Part_Type=Capacitor, ShowFields=YES, Status=Checked
C17 C37: library part MCD-02284_3, "Multilayer Ceramic Capacitor, 1.5 pF, 25 V, ± 0.1pF, C0G (NP0), 0201 [0603 Metric]", Case Code (Imperial)=0201, Case Code (Metric)=0603, Dielectric=C0G, Manufacturer=Murata, Manufacturer Part Number=GJM0335C1E1R5BB01D, Max Operating Temperature=125°C, Min Operating Temperature=-55°C, Package Quantity=15000, Supplier Part Number 1=490-11175-1-ND, Voltage Rating=25V, Case/Package=0201, Category="Ceramic Capacitors", ComponentLink1URL=http://tunmcdsvn.tun.st.com/Component_Documentation_Library/Trunk/Capacitor/MURATA_GRM_Series, ComponentLink2Description=https://datasheet.ciiva.com/11616/product-11616837.pdf?src-supplier=Avnet, ComponentLink2URL=https://datasheet.ciiva.com/11616/product-11616837.pdf?src-supplier=Avnet, ComponentLink3Description=https://datasheet.ciiva.com/170/partnumbering-e-01-170845.pdf?src-supplier=Digi-Key, ComponentLink3URL=https://datasheet.ciiva.com/170/partnumbering-e-01-170845.pdf?src-supplier=Digi-Key, ComponentLink4Description=https://datasheet.ciiva.com/11615/product-11615773.pdf?src-supplier=Avnet, ComponentLink4URL=https://datasheet.ciiva.com/11615/product-11615773.pdf?src-supplier=Avnet, ComponentLink5Description=https://datasheet.ciiva.com/18183/getdatasheetpartid-480423-18183785.pdf?src-supplier=Verical, ComponentLink5URL=https://datasheet.ciiva.com/18183/getdatasheetpartid-480423-18183785.pdf?src-supplier=Verical, Construction=Flat, Depth=0.3mm, Height=0.3mm, Lead Free="Lead Free", Length=0.6mm, Mounting Technology="Surface Mount", Packaging="Tape and Reel", Pricing 1="1=0.1, 10=0.069, 50=0.0376, 100=0.0308, 500=0.02198, 1000=0.01727, 2500=0.0157, 5000=0.01444 (USD)", Radiation Hardening=No, RoHS=Yes, RoHS Compliant=Yes, Series=GJM, Stock 1=1582621, Supplier 1=Digi-Key, Termination=SMD/SMT, Thickness=0.013inch, Voltage Rating (DC)=25V, Width=0.012inch
C19 C23: library part MCD-02196, "CAP CER 4.7UF 25V X6S 0603", Manufacturer=Murata, Manufacturer Part Number=GRM188C81E475KE11D, Supplier Part Number 1=490-7199-1-ND, Voltage=25V, Category="Ceramic Capacitors", ComponentLink1URL=http://tunmcdsvn.tun.st.com/Component_Documentation_Library/Trunk/Capacitor/TDK_C_Series, ComponentLink2Description=https://datasheet.ciiva.com/14906/partnumbering-e-01-14906423.pdf?src-supplier=Digi-Key, ComponentLink2URL=https://datasheet.ciiva.com/14906/partnumbering-e-01-14906423.pdf?src-supplier=Digi-Key, ComponentLink3Description=https://datasheet.ciiva.com/14906/partnumbering-e-01-14906424.pdf?src-supplier=Digi-Key, ComponentLink3URL=https://datasheet.ciiva.com/14906/partnumbering-e-01-14906424.pdf?src-supplier=Digi-Key, ComponentLink4Description=https://datasheet.ciiva.com/14906/partnumbering-e-01-14906425.pdf?src-supplier=Digi-Key, ComponentLink4URL=https://datasheet.ciiva.com/14906/partnumbering-e-01-14906425.pdf?src-supplier=Digi-Key, Pricing 1="1=0.27, 10=0.175, 50=0.1104, 100=0.0884, 500=0.06382, 1000=0.05645 (USD)", RoHS=Yes, Stock 1=947554, Supplier 1=Digi-Key
C20 C21 C22 C27 C28 C29: library part MCD-01703, "Multilayer Ceramic Capacitor, 1 uF, 50 V, ± 10%, X5R, 0603 [1608 Metric]", Manufacturer=Murata, Manufacturer Part Number=GRM188C81E475KE11D, Supplier Part Number 1=490-7199-1-ND, Voltage=25V, Category="Ceramic Capacitors", ComponentLink1URL=http://tunmcdsvn.tun.st.com/Component_Documentation_Library/Trunk/Capacitor/TDK_C_Series, ComponentLink2Description=https://datasheet.ciiva.com/14906/partnumbering-e-01-14906423.pdf?src-supplier=Digi-Key, ComponentLink2URL=https://datasheet.ciiva.com/14906/partnumbering-e-01-14906423.pdf?src-supplier=Digi-Key, ComponentLink3Description=https://datasheet.ciiva.com/14906/partnumbering-e-01-14906424.pdf?src-supplier=Digi-Key, ComponentLink3URL=https://datasheet.ciiva.com/14906/partnumbering-e-01-14906424.pdf?src-supplier=Digi-Key, ComponentLink4Description=https://datasheet.ciiva.com/14906/partnumbering-e-01-14906425.pdf?src-supplier=Digi-Key, ComponentLink4URL=https://datasheet.ciiva.com/14906/partnumbering-e-01-14906425.pdf?src-supplier=Digi-Key, Pricing 1="1=0.27, 10=0.175, 50=0.1104, 100=0.0884, 500=0.06382, 1000=0.05645 (USD)", RoHS=Yes, Stock 1=947554, Supplier 1=Digi-Key
C24 C25 C26 C30: library part MCD-01703, "Multilayer Ceramic Capacitor, 1 uF, 50 V, ± 10%, X5R, 0603 [1608 Metric]", Case Code (Imperial)=0603, Case Code (Metric)=1608, Dielectric=X5R, Manufacturer=Murata, Manufacturer Part Number=GRT188R61H105KE13D, Max Operating Temperature=85°C, Min Operating Temperature=-55°C, Ratings=AEC-Q200, Supplier Part Number 1=490-12330-1-ND, TOLERANCE=10%, Voltage Rating=50V, Case/Package=0603, Category="Ceramic Capacitors", ComponentLink1URL=http://tunmcdsvn.tun.st.com/Component_Documentation_Library/Trunk/Capacitor/YAGEO_X5R_Series, ComponentLink2Description=http://www.farnell.com/datasheets/2165959.pdf?src-supplier=Farnell, ComponentLink2URL=http://www.farnell.com/datasheets/2165959.pdf?src-supplier=Farnell, ComponentLink3Description=http://search.murata.co.jp/Ceramy/image/img/A01X/G101/ENG/GRT188R61H105KE13-01.pdf?src-supplier=Digi-Key, ComponentLink3URL=http://search.murata.co.jp/Ceramy/image/img/A01X/G101/ENG/GRT188R61H105KE13-01.pdf?src-supplier=Digi-Key, ComponentLink4Description=http://www.farnell.com/datasheets/2165959.pdf?src-supplier=Newark, ComponentLink4URL=http://www.farnell.com/datasheets/2165959.pdf?src-supplier=Newark, ComponentLink5Description=https://datasheet.octopart.com/GRT188R61H105KE13D-Murata-datasheet-67697751.pdf?src-supplier=Newark, ComponentLink5URL=https://datasheet.octopart.com/GRT188R61H105KE13D-Murata-datasheet-67697751.pdf?src-supplier=Newark, ComponentLink6Description=https://search.murata.co.jp/Ceramy/image/img/A01X/G101/ENG/GRT188R61H105KE13-01.pdf?src-supplier=Digi-Key, ComponentLink6URL=https://search.murata.co.jp/Ceramy/image/img/A01X/G101/ENG/GRT188R61H105KE13-01.pdf?src-supplier=Digi-Key, ComponentLink7Description=https://datasheet.octopart.com/GRT188R61H105KE13D-Murata-datasheet-165579666.pdf?src-supplier=TME, ComponentLink7URL=https://datasheet.octopart.com/GRT188R61H105KE13D-Murata-datasheet-165579666.pdf?src-supplier=TME, Length=0.063inch, Mounting Technology="Surface Mount", Packaging="Cut Tape", Pricing 1="1=0.17, 10=0.117, 50=0.07, 100=0.0551, 500=0.04066, 1000=0.03366 (USD)", RoHS=Yes, RoHS Compliant=Yes, Series=GRT, Stock 1=422240, Supplier 1=Digi-Key, Thickness=0.035inch, Voltage Rating (DC)=50V, Width=0.031inch
C31: library part MCD-02774, "Multilayer Ceramic Capacitors MLCC - SMD/SMT 0402 0.10uF 25volt X5R +/-10%", Case Code (Imperial)=0402, Case Code (Metric)=1005, Dielectric=X5R, Manufacturer=Murata, Manufacturer Part Number=GRM155R61E104KA87D, Max Operating Temperature=85°C, Min Operating Temperature=-55°C, Package Quantity=10000, Supplier Part Number 1=490-5920-1-ND, TOLERANCE=10%, Voltage Rating (DC)=25V, Case/Package=0402, Category="Ceramic Capacitors", ComponentLink1URL=http://tunmcdsvn.tun.st.com/Component_Documentation_Library/Trunk/Capacitor/TDK_CGA_Series, ComponentLink2Description=https://datasheet.ciiva.com/11618/product-11618757.pdf?src-supplier=Avnet, ComponentLink2URL=https://datasheet.ciiva.com/11618/product-11618757.pdf?src-supplier=Avnet, ComponentLink3Description=https://datasheet.ciiva.com/29199/454084-da-01-en-vs-kondensator-0402-29199796.pdf?src-supplier=Conrad, ComponentLink3URL=https://datasheet.ciiva.com/29199/454084-da-01-en-vs-kondensator-0402-29199796.pdf?src-supplier=Conrad, ComponentLink4Description=https://datasheet.ciiva.com/6270/partnumbering-e-01-6270936.pdf?src-supplier=Digi-Key, ComponentLink4URL=https://datasheet.ciiva.com/6270/partnumbering-e-01-6270936.pdf?src-supplier=Digi-Key, ComponentLink5Description=https://datasheet.ciiva.com/6270/partnumbering-e-01-6270934.pdf?src-supplier=Digi-Key, ComponentLink5URL=https://datasheet.ciiva.com/6270/partnumbering-e-01-6270934.pdf?src-supplier=Digi-Key, ComponentLink6Description=https://datasheet.ciiva.com/6270/partnumbering-e-01-6270938.pdf?src-supplier=Digi-Key, ComponentLink6URL=https://datasheet.ciiva.com/6270/partnumbering-e-01-6270938.pdf?src-supplier=Digi-Key, ComponentLink7Description=https://datasheet.ciiva.com/16467/product-16467303.pdf?src-supplier=Future+Electronics, ComponentLink7URL=https://datasheet.ciiva.com/16467/product-16467303.pdf?src-supplier=Future+Electronics, Height=0.5mm, Lead Free=5697LeadFree, Length=1mm, Packaging="Cut Tape", Pricing 1="1=0.1, 10=0.047, 50=0.0272, 100=0.0211, 500=0.0159, 1000=0.0125, 2500=0.01136, 5000=0.01045 (USD)", RoHS=Yes, RoHS Compliant=Yes, Series=GRM, Stock 1=4700358, Supplier 1=Digi-Key, Termination=Standard, Weight=0.000388oz, Width=0.5mm
C39: library part MCD-00011, "Capacitor, MLCC, 10nF, 16V, X7R, +/-10%, 0402, T=0.5mm", Manufacturer=YAGEO, Manufacturer Part Number=CC0402KRX7R7BB103, Package=0402, Component_Country_Of_Origin=China, ComponentLink1URL=http://tunmcdsvn.tun.st.com/Component_Documentation_Library/Trunk/Capacitor/YAGEO_X7R_Series, ID=2469, Internal_Part_Number=MCD-00011, Manufacturer_Part_Number=CC0402KRX7R7BB103, Order_Code_Digikey=311-1042-1-ND, Order_Code_Farnell=3019275, Order_Code_RS=3019275, Part_Preference=Recommended, Part_Type=Capacitor, ShowFields=YES, Status=Released
CN1: library part MCD-00639, "Header, 7x2, 1.27mm, VR, SMD, T=5.97mm", Manufacturer=SAMTEC, Manufacturer Part Number=FTSH-107-01-L-DV-K, Component_Country_Of_Origin="China, Costa Rica, Malaysia, United States, Vietnam", ComponentLink1URL=http://tunmcdsvn.tun.st.com/Component_Documentation_Library/Trunk/Connector/SAMTEC_FTSH_Series/, ID=3107, Internal_Part_Number=MCD-00639, Manufacturer_Part_Number=FTSH-107-01-L-DV-K, Order_Code_Digikey=SAM9449-ND, Order_Code_Farnell=2856443, Order_Code_RS=179-8765, Part_Preference=Recommended, Part_Type=Connector, ShowFields=YES, Status=Released
CN2: "Conn, Ffc/fpc, R/a, 24Pos, 1Row, 0.5Mm Rohs Compliant: Yes", Manufacturer=Molex, Manufacturer Part Number=503480-2400, Supplier Part Number 1=WM27000CT-ND, Category="FFC / FPC", Pricing 1="1=2.12, 10=1.806, 100=1.492, 1000=1.17791 (USD)", RoHS=No, Stock 1=23010, Supplier 1=Digi-Key
CN3: library part MCD-01583, "Connector_RF, 0Hz to 6GHz, 50R, VR, SMD, T= 1.25mm", Manufacturer=HIROSE, BMS_Part_Number=9187005, Component_Country_Of_Origin="Japan, Malaysia", ComponentLink1URL=http://tunmcdsvn.tun.st.com/Component_Documentation_Library/Trunk/Connector/HIROSE_U.FL_Series/, ID=3683, Internal_Part_Number=MCD-01583, Manufacturer Part Number=U.FL-R-SMT-1, Manufacturer_Part_Number=U.FL-R-SMT-1, Order_Code_Digikey=N/A, Order_Code_Farnell=1688077, Order_Code_RS=557-981, Part_Preference=Recommended, Part_Type=Connector, ShowFields=YES, Status=Released
CN5: library part MCD-02936, "CR2032 compact battery holder", Manufacturer=HARWIN, Manufacturer Part Number=S8421-45R, Component_Country_Of_Origin=Taiwan, ComponentLink1URL=http://tunmcdsvn.tun.st.com/Component_Documentation_Library/Trunk/Connector/HARWIN_S8421-45R, ID=5052, Internal_Part_Number=MCD-02936, Manufacturer_Part_Number=S8421-45R, Order_Code_Digikey=952-1737-2-ND, Order_Code_Farnell=3517387, Order_Code_RS=N/A, Part_Preference=Recommended, Part_Type=Connector, ShowFields=YES, Status=Checked
D1 D2 D3: "Diode, Schottky Barrier, Vr 30V, If 0.5A, Pkg SOD-123, Vf 0.43V, Tj +125degc, Cs 5.5A", Manufacturer="ON Semiconductor / Fairchild", Manufacturer Part Number=MBR0530T1G, Category="Schottky Diodes", ComponentLink1Description=https://datasheet.ciiva.com/5763/85890-5763210.pdf?src-supplier=Farnell, ComponentLink1URL=https://datasheet.ciiva.com/5763/85890-5763210.pdf?src-supplier=Farnell, ComponentLink2Description=https://datasheet.ciiva.com/14168/sz600926-e-14168053.pdf?src-supplier=Distrelec, ComponentLink2URL=https://datasheet.ciiva.com/14168/sz600926-e-14168053.pdf?src-supplier=Distrelec, ComponentLink3Description=https://datasheet.ciiva.com/22659/1708258-22659024.pdf?src-supplier=Element14, ComponentLink3URL=https://datasheet.ciiva.com/22659/1708258-22659024.pdf?src-supplier=Element14, ComponentLink4Description=https://datasheet.ciiva.com/8299/mbr0530t1-d-8299686.pdf?src-supplier=Avnet, ComponentLink4URL=https://datasheet.ciiva.com/8299/mbr0530t1-d-8299686.pdf?src-supplier=Avnet, ComponentLink5Description=https://datasheet.ciiva.com/8300/mbr0530t1-d-8300038.pdf?src-supplier=Avnet, ComponentLink5URL=https://datasheet.ciiva.com/8300/mbr0530t1-d-8300038.pdf?src-supplier=Avnet, ComponentLink6Description=https://datasheet.ciiva.com/915/mbr0530t1-d-915467.pdf?src-supplier=Digi-Key, ComponentLink6URL=https://datasheet.ciiva.com/915/mbr0530t1-d-915467.pdf?src-supplier=Digi-Key, ComponentLink7Description=https://datasheet.ciiva.com/915/mbr0530t1-d-915468.pdf?src-supplier=Digi-Key, ComponentLink7URL=https://datasheet.ciiva.com/915/mbr0530t1-d-915468.pdf?src-supplier=Digi-Key, ComponentLink8Description=https://datasheet.ciiva.com/915/mbr0530t1-d-915469.pdf?src-supplier=Digi-Key, ComponentLink8URL=https://datasheet.ciiva.com/915/mbr0530t1-d-915469.pdf?src-supplier=Digi-Key, ComponentLink9Description=https://datasheet.ciiva.com/14560/70099496-14560951.pdf?src-supplier=Allied+Electronics, ComponentLink9URL=https://datasheet.ciiva.com/14560/70099496-14560951.pdf?src-supplier=Allied+Electronics, ComponentLink10Description=https://datasheet.ciiva.com/7962/85890-7962700.pdf?src-supplier=Element14, ComponentLink10URL=https://datasheet.ciiva.com/7962/85890-7962700.pdf?src-supplier=Element14, ComponentLink11Description=https://datasheet.ciiva.com/7962/85890-7962701.pdf?src-supplier=Element14, ComponentLink11URL=https://datasheet.ciiva.com/7962/85890-7962701.pdf?src-supplier=Element14, ComponentLink12Description=https://datasheet.ciiva.com/7962/85890-7962702.pdf?src-supplier=Element14, ComponentLink12URL=https://datasheet.ciiva.com/7962/85890-7962702.pdf?src-supplier=Element14, Pricing 1="3000=0.0566, 9000=0.0503, 24000=0.0471, 45000=0.0409 (USD)", RoHS=Yes, Stock 1=24000, Supplier 1="Arrow Electronics", Supplier Part Number 1=MBR0530T1G
D5: library part 150141AS73100, "WL-SMTW Mono-color TOP LED Waterclear, size 3528, Amber, 2V, 120°", Case/Size Code=3528, Emitting Color=Amber, Forward Voltage=2V, Manufacturer="Wurth Elektronik", Operating Temperature Max=85°C, Operating Temperature Min=-40°C, Category="Signal LEDs", Chip Technology=AlInGaP, ComponentLink1Description="Website Link", ComponentLink1URL=https://www.we-online.com/redexpert/article/150141AS73100?ad, ComponentLink2Description="Datasheet Link", ComponentLink2URL=https://www.we-online.com/redexpert/spec/150141AS73100?ad, Dominant Wavelength=605nm, Height=1.9mm, Length=3.5mm, Luminous Intensity=330mcd, Manufacturer Part Number=150141AS73100, Match Code=WL-SMTW, Mount="Surface Mount", Packaging="Tape and Reel", Peak Wavelength=610nm, Viewing Angle=120°, Width=2.8mm
Designator3 Designator16: library part MCD-00279
HW4: library part MCD-00625, "\"STMicroelectronics\" logo footprint for PCB"
J2: library part 5034800540_5_circuits, "No Description Available", Manufacturer=Molex, Mfr_Name="Molex Connector Corporation", Copyright="Copyright (C) 2023 Ultra Librarian. All rights reserved.", Manufacturer Part Number=5034800540, Manufacturer_Part_Number=5034800540, RefDes=RefDes, Type=DEV
L1: library part MCD-03438, "Inductor, MLCC, 10uH, +/-20%, 300mA, 845mR, 0805, T=1.45mm", Manufacturer=MURATA, Manufacturer Part Number=LQM21DN100M70L, Package=0805, Component_Country_Of_Origin=Japan, ComponentLink1URL=http://tunmcdsvn.tun.st.com/Component_Documentation_Library/Trunk/Inductor/MURATA_LQM21DN100M70L, ID=5554, Internal_Part_Number=MCD-03438, Manufacturer_Part_Number=LQM21DN100M70L, Order_Code_Digikey=490-LQM21DN100M70LTR-ND, Order_Code_Farnell=NA, Order_Code_RS=NA, Part_Preference=Recommended, Part_Type=Inductor, ShowFields=YES, Status=Checked
L2: library part MCD-03439, "Inductor, MLCC, 22nH, +/-2%, 350mA, 0.58R, 0402, T=1.45mm", Manufacturer=MURATA, Manufacturer Part Number=LQG15HN22NG02D, Package=0402, Component_Country_Of_Origin=Japan, ComponentLink1URL=http://tunmcdsvn.tun.st.com/Component_Documentation_Library/Trunk/Inductor/MURATA_LQG15HN22NG02D, ID=5555, Internal_Part_Number=MCD-03439, Manufacturer_Part_Number=LQG15HN22NG02D, Order_Code_Digikey=490-LQG15HN22NG02DTR-ND, Order_Code_Farnell=3354168, Order_Code_RS=3354168, Part_Preference=Recommended, Part_Type=Inductor, ShowFields=YES, Status=Checked
L3: library part MCD-03552, "Inductor RF Chip Thin Film 2.4nH 0.1nH 500MHz 14Q-Factor 500mA 200mOhm DCR 0201 Paper T/R", Manufacturer=Murata, Manufacturer Part Number=LQP03TN2N4B02D, Supplier Part Number 1=490-6724-1-ND, Category="Fixed Inductors", ComponentLink1URL=http://tunmcdsvn.tun.st.com/Component_Documentation_Library/Trunk/Inductor/MURATA_LQP03TG_Series/LQP03TG0N5B02D, ComponentLink2Description=https://datasheet.ciiva.com/29692/s0084e-29692446.pdf?src-supplier=Digi-Key, ComponentLink2URL=https://datasheet.ciiva.com/29692/s0084e-29692446.pdf?src-supplier=Digi-Key, ComponentLink3Description=https://datasheet.ciiva.com/16444/product-16444478.pdf?src-supplier=Future+Electronics, ComponentLink3URL=https://datasheet.ciiva.com/16444/product-16444478.pdf?src-supplier=Future+Electronics, ComponentLink4Description=https://datasheet.ciiva.com/14826/1750lqp03tn2n4b0223-14826711.pdf?src-supplier=Arrow+Electronics, ComponentLink4URL=https://datasheet.ciiva.com/14826/1750lqp03tn2n4b0223-14826711.pdf?src-supplier=Arrow+Electronics, Pricing 1="1=0.1, 10=0.041, 25=0.0364, 50=0.031, 100=0.0273, 250=0.025, 500=0.02272, 1000=0.01909, 2500=0.01636 (USD)", RoHS=Yes, Stock 1=40543, Supplier 1=Digi-Key
L4: library part MCD-03552_1, "Inductor RF Chip Thin Film 3.3nH 0.1nH 500MHz 14Q-Factor 450mA 250mOhm DCR 0201 Paper T/R", Manufacturer=Murata, Manufacturer Part Number=LQP03TN3N3B02D, Supplier Part Number 1=490-6728-1-ND, Category="Fixed Inductors", ComponentLink1URL=http://tunmcdsvn.tun.st.com/Component_Documentation_Library/Trunk/Inductor/MURATA_LQP03TG_Series/LQP03TG0N5B02D, ComponentLink2Description=https://datasheet.ciiva.com/29692/s0084e-29692446.pdf?src-supplier=Digi-Key, ComponentLink2URL=https://datasheet.ciiva.com/29692/s0084e-29692446.pdf?src-supplier=Digi-Key, ComponentLink3Description=https://datasheet.ciiva.com/16444/product-16444478.pdf?src-supplier=Future+Electronics, ComponentLink3URL=https://datasheet.ciiva.com/16444/product-16444478.pdf?src-supplier=Future+Electronics, ComponentLink4Description=https://datasheet.ciiva.com/14826/1750lqp03tn2n4b0223-14826711.pdf?src-supplier=Arrow+Electronics, ComponentLink4URL=https://datasheet.ciiva.com/14826/1750lqp03tn2n4b0223-14826711.pdf?src-supplier=Arrow+Electronics, ComponentLink5Description=https://datasheet.ciiva.com/4976/product-4976199.pdf?src-supplier=Mouser, ComponentLink5URL=https://datasheet.ciiva.com/4976/product-4976199.pdf?src-supplier=Mouser, Pricing 1="1=0.1, 10=0.041, 25=0.0364, 50=0.031, 100=0.0273, 250=0.025, 500=0.02272, 1000=0.01909, 2500=0.01636 (USD)", RoHS=Yes, Stock 1=987695, Supplier 1=Digi-Key
L6: library part MCD-03552_1, "0201 0 ohm", ComponentLink1URL=http://tunmcdsvn.tun.st.com/Component_Documentation_Library/Trunk/Inductor/MURATA_LQP03TG_Series/LQP03TG0N5B02D, ComponentLink2Description=https://datasheet.ciiva.com/29692/s0084e-29692446.pdf?src-supplier=Digi-Key, ComponentLink2URL=https://datasheet.ciiva.com/29692/s0084e-29692446.pdf?src-supplier=Digi-Key, ComponentLink3Description=https://datasheet.ciiva.com/16444/product-16444478.pdf?src-supplier=Future+Electronics, ComponentLink3URL=https://datasheet.ciiva.com/16444/product-16444478.pdf?src-supplier=Future+Electronics, ComponentLink4Description=https://datasheet.ciiva.com/14826/1750lqp03tn2n4b0223-14826711.pdf?src-supplier=Arrow+Electronics, ComponentLink4URL=https://datasheet.ciiva.com/14826/1750lqp03tn2n4b0223-14826711.pdf?src-supplier=Arrow+Electronics, ComponentLink5Description=https://datasheet.ciiva.com/4976/product-4976199.pdf?src-supplier=Mouser, ComponentLink5URL=https://datasheet.ciiva.com/4976/product-4976199.pdf?src-supplier=Mouser
L9: library part 74404042100, "WE-LQS SMT Power Inductor, size 4018, 10uH, 1.2A, 0.15Ohm", Case/Size Code=4018, DC Resistance=0.15Ohm, Inductance=10uH, Manufacturer="Wurth Elektronik", Operating Temperature Max=125°C, Operating Temperature Min=-40°C, Rated Current=1.2A, Saturation Current=1.7A, Self Resonant Frequency=28MHz, Category="Power Inductors", ComponentLink1Description="Website Link", ComponentLink1URL=https://www.we-online.com/redexpert/article/74404042100?ad, ComponentLink2Description="Datasheet Link", ComponentLink2URL=https://www.we-online.com/redexpert/spec/74404042100?ad, Height=1.8mm, Length=4mm, Manufacturer Part Number=74404042100, Match Code=WE-LQS, Mount="Surface Mount", Packaging="Tape and Reel", Width=4mm
Q1: library part SI1308EDL, "Transistor, MOSFET, N-CH, 30V, 1.4A, SOT-323", Manufacturer=VISHAY, Manufacturer Part Number=SI1308EDL-T1-GE3, Package=SOT323-3, Component_Country_Of_Origin=China, ComponentLink1URL=http://tunmcdsvn.tun.st.com/Component_Documentation_Library/Trunk/Transistor/VISHAY_SI1308EDL-T1-GE3, ID=4610, Internal_Part_Number=MCD-02504, Manufacturer_Part_Number=SI1308EDL-T1-GE3, Order_Code_Digikey=SI1308EDL-T1-GE3TR-ND, Order_Code_Farnell=2283646, Order_Code_RS=165-7247, Part_Preference=Recommended, Part_Type=Transistor, ShowFields=YES, Status=Released
R1 R2 R3 R4 R5 R6 R17 R18 R20 R21 R22 R23: library part MCD-00052, "Resistor, 0R, 0402, +/-5%, 1/16W", Manufacturer=YAGEO, Manufacturer Part Number=RC0402JR-070RL, Package=0402, Component_Country_Of_Origin=China, ComponentLink1URL=http://tunmcdsvn.tun.st.com/Component_Documentation_Library/Trunk/Resistor/YAGEO_RC_L_Series, ID=2540, Internal_Part_Number=MCD-00052, Manufacturer_Part_Number=RC0402JR-070RL, Order_Code_Digikey=311-0.0JRCT-ND, Order_Code_Farnell=9232516RL, Order_Code_RS=9232516RL, Part_Preference=Recommended, Part_Type=Resistor, ShowFields=YES, Status=Released
R7 R10: library part MCD-02517, "Res Thick Film 0402 3 Ohm 1% 1/16W ±200ppm/°C Molded SMD Paper T/R", Manufacturer=Yageo, Manufacturer Part Number=RC0402FR-073RL, Supplier Part Number 1=3974298, Category="Chip SMD Resistors", ComponentLink1URL=http://tunmcdsvn.tun.st.com/Component_Documentation_Library/Trunk/Resistor/YAGEO_RL_Series, ComponentLink2Description=https://datasheet.ciiva.com/22655/443714-22655095.pdf?src-supplier=Farnell, ComponentLink2URL=https://datasheet.ciiva.com/22655/443714-22655095.pdf?src-supplier=Farnell, ComponentLink3Description=https://datasheet.ciiva.com/6069/443714-6069962.pdf?src-supplier=Farnell, ComponentLink3URL=https://datasheet.ciiva.com/6069/443714-6069962.pdf?src-supplier=Farnell, ComponentLink4Description=https://datasheet.ciiva.com/16746/pyu-rc0402-51-rohs-l-6-r-16746959.pdf?src-supplier=Future+Electronics, ComponentLink4URL=https://datasheet.ciiva.com/16746/pyu-rc0402-51-rohs-l-6-r-16746959.pdf?src-supplier=Future+Electronics, Pricing 1="10=0.014, 100=0.008, 500=0.007, 2500=0.005, 5000=0.004, 10000=0.002, 50000=0.0019, 100000=0.0018 (EUR)", RoHS=Yes, Stock 1=8190, Supplier 1=Farnell